# EAGLE board Datalogging_SMD_Prototye (EAGLE 6.0)
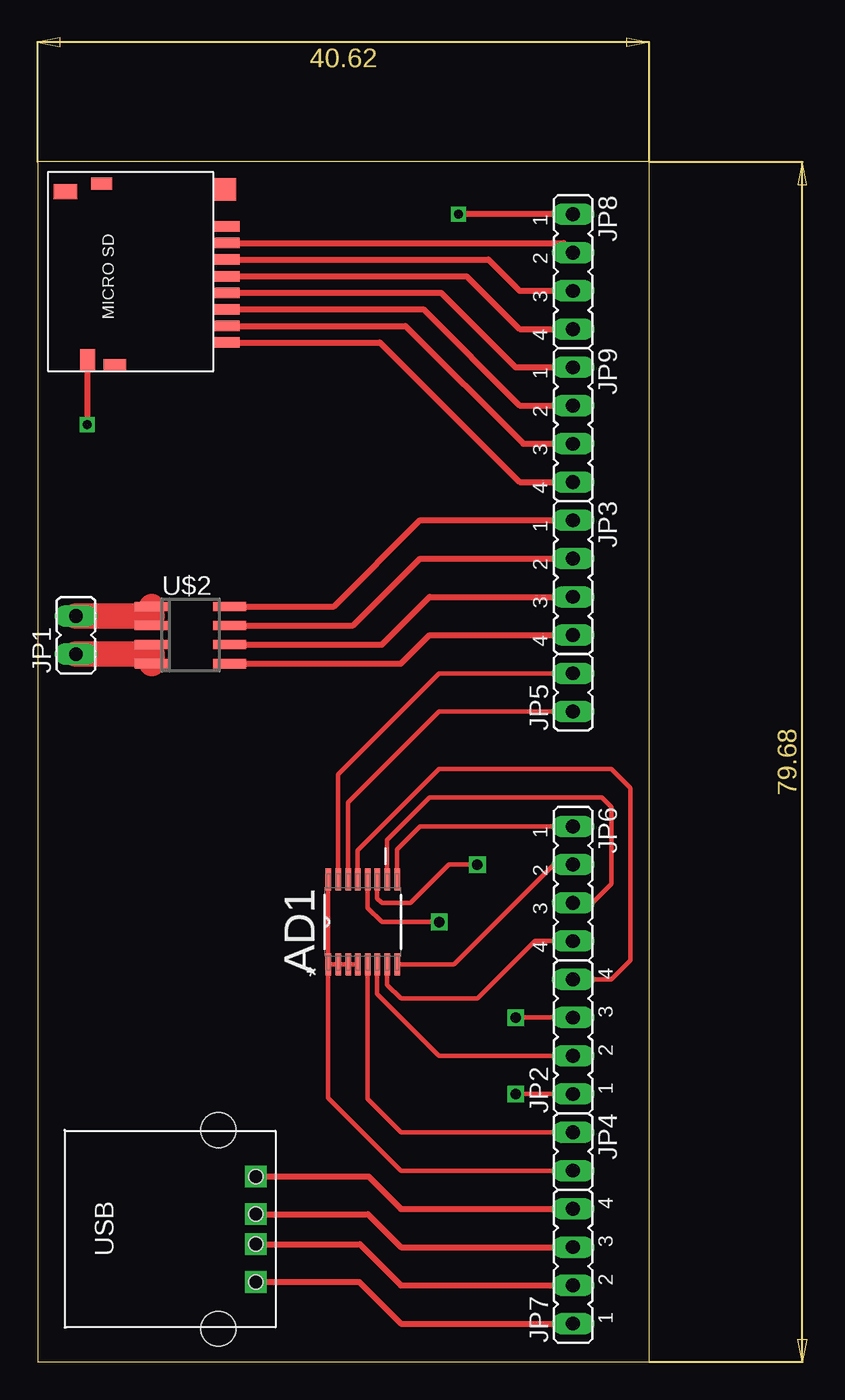
[diagram p0: board, top side]
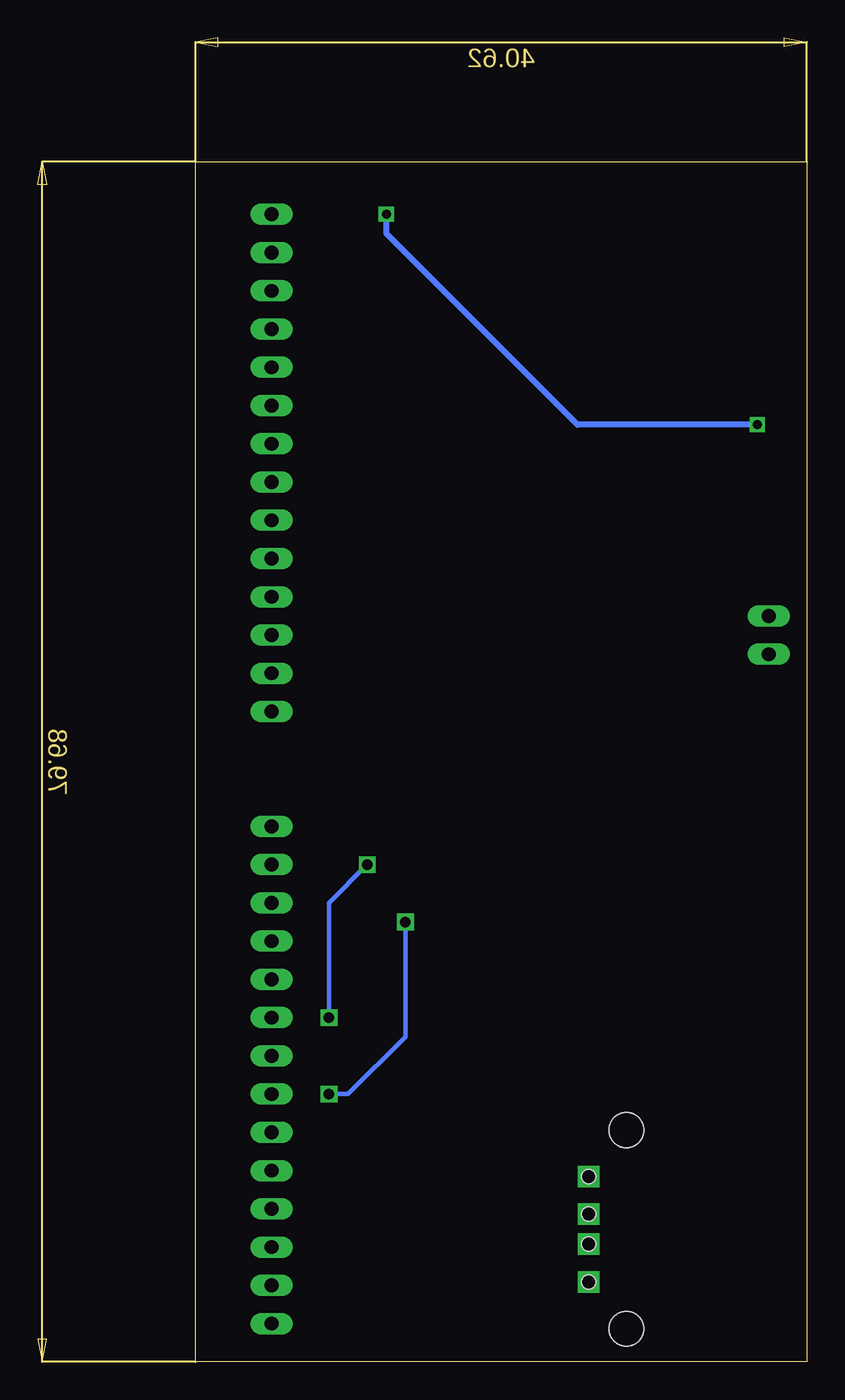
[diagram p1: board, bottom side, seen from below]

Size 40.62 x 79.68 mm. Coordinates in mm from the lower left corner, seen from the top.
Outline: 0,0 40.62,0 40.62,79.68 0,79.68 0,0
Copper layers (1*16): Top 0.035mm / dielectric 1.5mm / Bottom 0.035mm
Design rules: minimum track width 10mil, minimum drill 24mil, track to track 12mil, track to pad 12mil, pad to pad 12mil, via to via 8mil, smd to smd 12mil, copper to edge 40mil, drill to drill 8mil, minimum pad ring 10mil, minimum via ring 8mil, stop-mask expansion 4mil, vias tented up to drill 0mil, thermal gap 10mil

## Footprints (pad centres in the part's own frame; a part is rotated, then mirrored left to right if it is on the bottom)
SOP65P640X120-16N = smd 1.473 x 0.356: 1 -2.819,2.286; 2 -2.819,1.626; 3 -2.819,0.965; 4 -2.819,0.33; 5 -2.819,-0.33; 6 -2.819,-0.965; 7 -2.819,-1.626; 8 -2.819,-2.286; 9 2.819,-2.286; 10 2.819,-1.626; 11 2.819,-0.965; 12 2.819,-0.33; 13 2.819,0.33; 14 2.819,0.965; 15 2.819,1.626; 16 2.819,2.286
JP1 = drill 0.914 long: 1 0,-1.27; 2 0,1.27
JP4 = drill 0.914 long: 1 -3.81,0; 2 -1.27,0; 3 1.27,0; 4 3.81,0
USBA_SOCKET = drill 0.92 square: 5V 3.58,5.61; D+ 1.08,5.6; D- -0.92,5.61; GND -3.42,5.61 | hole 2.3: -6.5,3.11; 6.7,3.11 | hole 0.92: -3.42,5.61; -0.92,5.61; 1.08,5.61; 3.58,5.61
SO8 = smd 0.6 x 2.2: 1 -1.905,-2.6; 2 -0.635,-2.6; 3 0.635,-2.6; 4 1.905,-2.6; 5 1.905,2.6; 6 0.635,2.6; 7 -0.635,2.6; 8 -1.905,2.6
MICROSD_SOCKET = smd 1.45 x 1: CD -5.875,1.75 | smd 1 x 1.55: CD2 5.3,3.225 | smd 0.7 x 1.75: CLK -1.4,-7.475; CS 1.9,-7.475; DI 0.8,-7.475; DO -3.6,-7.475; NC 3,-7.475; RSV -4.7,-7.475; VDD -0.3,-7.475; VSS -2.5,-7.475 | smd 1.5 x 1.5: MOUNT2 5.45,-7.35 | smd 0.8 x 1.5: MOUNT3 -6.2,-0.05 | smd 0.8 x 1.4: MOUNT4 5.85,0.825

## Placement (x,y rotation side)
AD1  AD7993BRUZ-0  [SOP65P640X120-16N]  21.59,29.21 90 top
JP1  [JP1]  2.54,48.26 0 top
JP2  [JP4]  35.56,21.59 90 top
JP3  [JP4]  35.56,52.07 270 top
JP4  [JP1]  35.56,13.97 180 top
JP5  [JP1]  35.56,44.45 0 top
JP6  [JP4]  35.56,31.75 270 top
JP7  [JP4]  35.56,6.35 90 top
JP8  [JP4]  35.56,72.39 270 top
JP9  [JP4]  35.56,62.23 270 top
U$1  USBA_SOCKET  [USBA_SOCKET]  8.89,8.89 270 top
U$2  ACS712  [SO8]  10.16,48.26 270 top
U$3  MICROSD_SOCKET  [MICROSD_SOCKET]  5.08,72.39 90 top

## Library data of the parts
AD1 = ADC; MPN: AD7993BRUZ-0; OC_FARNELL: 1078309; OC_NEWARK: 59K6101; PACKAGE: TSSOP-16; SUPPLIER: Analog Devices
JP1-JP9 = jumper
U$1 U$3 = ekohub2013
U$2 = eko-parts

## Nets
N$1: JP1.1 U$2.3 U$2.4
N$2: JP1.2 U$2.1 U$2.2
N$3: AD1.5 JP4.1
N$4: AD1.11 JP2.3
N$5: AD1.1 AD1.2 AD1.3 AD1.4 AD1.16 JP4.2
N$6: JP3.2 U$2.7
N$7: JP3.3 U$2.6
N$8: AD1.6 JP2.2
N$9: AD1.12 JP2.1
N$10: AD1.13 JP2.4
N$12: AD1.7 JP6.4
N$13: AD1.10 JP6.3
N$14: AD1.8 JP6.2
N$15: AD1.9 JP6.1
N$19: JP7.4 U$1.GND
N$21: JP7.3 U$1.D-
N$24: JP7.2 U$1.D+
N$25: JP7.1 U$1.5V
N$26: JP8.1 U$3.CD
N$27: JP8.2 U$3.CS
N$28: JP8.3 U$3.DI
N$29: JP8.4 U$3.VDD
N$30: JP9.1 U$3.CLK
N$31: JP9.2 U$3.VSS
N$32: JP9.3 U$3.DO
N$33: JP9.4 U$3.RSV
N$36: JP3.4 U$2.5
N$37: JP3.1 U$2.8
SCL: AD1.15 JP5.2
SDA: AD1.14 JP5.1

## Tracks (layer width: path | path; a pad name or v marks a point on that pad's centre or on a via)
N$1
  Top 0.406: U$2.3 7.62,47.62 7.62,46.99
  Top 1.676: U$2.4 7.62,46.35 7.62,46.99 JP1.1
N$2
  Top 0.406: 7.56,49.53 U$2.2
  Top 1.676: JP1.2 7.56,49.53 | 7.62,49.53 7.56,49.53 | 7.56,49.53 U$2.1
N$3
  Top 0.305: AD1.5 21.92,17.45 24.13,15.24 JP4.1
N$4  (via drill 0.7)
  Top 0.305: AD1.11 22.55,30.79 22.86,30.48 24.77,30.48 27.3,33.02 v29.21,33.02 | JP2.3 v31.75,22.86
  Bottom 0.305: v31.75,22.86 31.75,30.48 v29.21,33.02
N$5
  Top 0.305: AD1.16 AD1.1 | AD1.4 AD1.3 AD1.2 AD1.1 | AD1.1 19.3,17.53 24.13,12.7 JP4.2
N$6
  Top 0.406: U$2.7 20.95,48.9 25.4,53.34 JP3.2
N$7
  Top 0.406: U$2.6 22.86,47.62 26.04,50.8 JP3.3
N$8
  Top 0.305: AD1.6 22.55,24.43 26.67,20.32 JP2.2
N$9  (via drill 0.7)
  Top 0.305: JP2.1 v31.75,17.78 | AD1.12 21.92,30.15 22.86,29.21 v26.67,29.21
  Bottom 0.305: v26.67,29.21 26.67,21.59 30.48,17.78 v31.75,17.78
N$10
  Top 0.305: AD1.13 21.26,33.96 26.67,39.37 38.1,39.37 39.37,38.1 39.37,26.67 38.1,25.4 JP2.4
N$12
  Top 0.305: AD1.7 23.22,25.04 24.13,24.13 29.21,24.13 33.02,27.94 JP6.4
N$13
  Top 0.305: AD1.10 23.22,34.65 26.04,37.47 37.47,37.47 38.1,36.83 38.1,31.75 36.83,30.48
  Top 0.406: 36.83,30.48 JP6.3
N$14
  Top 0.305: AD1.8 27.66,26.39 34.29,33.02 JP6.2
N$15
  Top 0.305: AD1.9 23.88,34.04 25.4,35.56 JP6.1
N$19
  Top 0.406: U$1.GND 21.98,12.31 24.13,10.16 JP7.4
N$21
  Top 0.406: U$1.D- 21.94,9.81 24.13,7.62 JP7.3
N$24
  Top 0.406: U$1.D+ 21.4,7.81 24.13,5.08 JP7.2
N$25
  Top 0.406: U$1.5V 21.36,5.31 24.13,2.54 JP7.1
N$26  (2 unrouted)
  Top 0.406: JP8.1 27.94,76.2 | U$3.CD 3.3,66.52 3.3,62.23
  Bottom 0.406: 3.3,62.23 15.24,62.23 27.94,74.93 27.94,76.2
N$27
  Top 0.406: U$3.CS 34.93,74.29 JP8.2
N$28
  Top 0.406: U$3.DI 29.93,73.19 32,71.12 JP8.3
N$29
  Top 0.406: U$3.VDD 28.49,72.09 32,68.58 JP8.4
N$30
  Top 0.406: U$3.CLK 26.8,70.99 31.75,66.04 JP9.1
N$31
  Top 0.406: U$3.VSS 25.61,69.89 32,63.5 JP9.2
N$32
  Top 0.406: U$3.DO 24.43,68.79 32.26,60.96 JP9.3
N$33
  Top 0.406: U$3.RSV 22.73,67.69 32,58.42 JP9.4
N$34  (via drill 0.6)
  other vias: 27.94,76.2
N$35  (via drill 0.6)
  other vias: 3.3,62.23
N$36
  Top 0.406: U$2.5 24.13,46.35 26.04,48.26 JP3.4
N$37
  Top 0.406: U$2.8 19.68,50.16 25.4,55.88 JP3.1
SCL
  Top 0.305: AD1.15 19.96,39.01 26.67,45.72 JP5.2
SDA
  Top 0.305: AD1.14 20.62,37.13 26.67,43.18 JP5.1